# EAGLE board Croduino Damba (EAGLE 6.4)
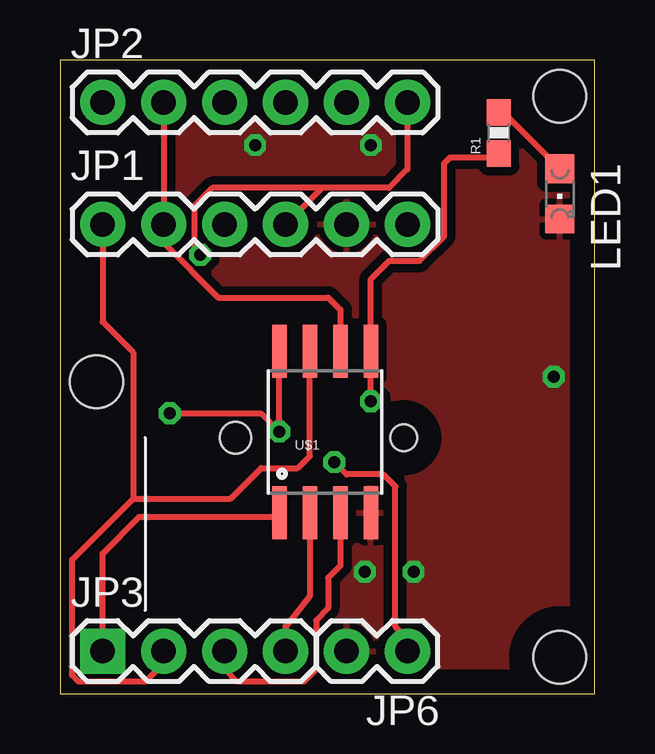
[diagram p0: board, top side]
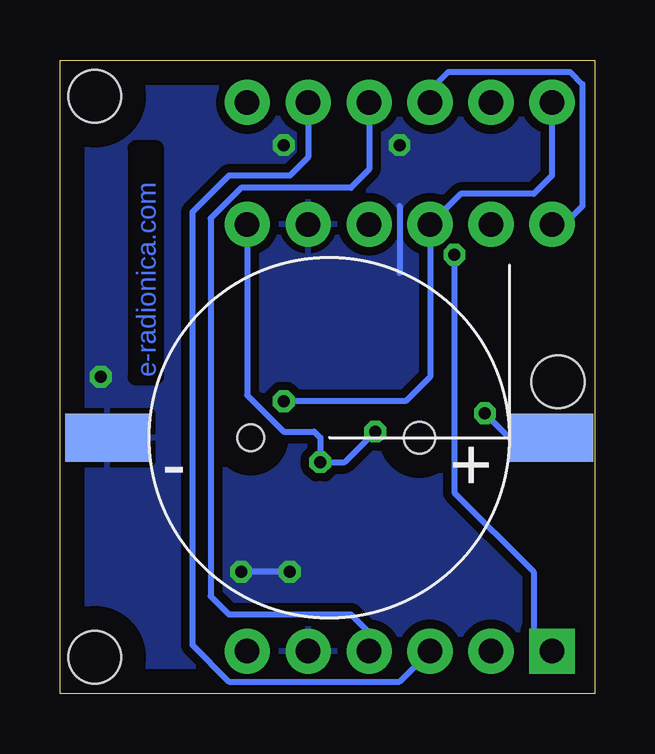
[diagram p1: board, bottom side, seen from below]

Size 22.28 x 26.41 mm. Coordinates in mm from the lower left corner, seen from the top.
Outline: 0,0 22.28,0 22.28,26.41 0,26.41 0,0
Copper layers (1*16): Top 0.035mm / dielectric 1.5mm / Bottom 0.035mm
Design rules "default *": minimum track width 10mil, minimum drill 24mil, track to track 8mil, track to pad 8mil, pad to pad 8mil, via to via 8mil, smd to smd 8mil, copper to edge 40mil, drill to drill 8mil, minimum pad ring 10mil, minimum via ring 8mil, stop-mask expansion 0mil, vias tented up to drill 0mil, thermal gap 10mil
Net classes: 0 default: clearance 0.355 mm
Holes 2.2 mm at 20.83,1.52 20.83,24.89 1.52,13

## Footprints (pad centres in the part's own frame; a part is rotated, then mirrored left to right if it is on the bottom)
1X06 = drill 1.016 pad 1.88: 1 0,0; 2 2.54,0; 3 5.08,0; 4 7.62,0; 5 10.16,0; 6 12.7,0
1X04 = drill 1.016 pad 1.88 square: 1 0,0 | drill 1.016 pad 1.88: 2 2.54,0; 3 5.08,0; 4 7.62,0
1X02 = drill 1.016 pad 1.88: 1 0,0; 2 2.54,0
CHIPLED_0805 = smd 1.2 x 1.2: A 0,-1.05; C 0,1.05
0603-RES = smd 1.1 x 1: 1 -0.85,0; 2 0.85,0
SO08-EIAJ = smd 0.61 x 2.21: 1 -1.905,-3.378; 2 -0.635,-3.378; 3 0.635,-3.378; 4 1.905,-3.378; 5 1.905,3.353; 6 0.635,3.353; 7 -0.635,3.353; 8 -1.905,3.353
BATERIJA12MM = smd 3.5 x 2 bottom: + 9.25,0; - -9.25,0 | hole 1.1: -3.276,0 | hole 1.3: 3.744,0

## Placement (x,y rotation side)
JP1  [1X06]  1.78,19.56 0 top
JP2  [1X06]  1.78,24.64 0 top
JP3  [1X04]  1.78,1.78 0 top
JP6  [1X02]  14.48,1.78 180 top
LED1  plava  [CHIPLED_0805]  20.83,20.83 180 top
R1  470  [0603-RES]  18.29,23.37 90 top
U$1  ATTINY45  [SO08-EIAJ]  11.05,10.92 0 top
U$2  BATERIJA_CR1220  [BATERIJA12MM]  11.05,10.67 180 top
U$3  [UTICNICA3MM]  18.8,6.1 270 top
U$4  [OSH3MM]  0.25,9.65 270 top
U$5  [DAMBA]  13.46,19.05 270 top

## Library data of the parts
JP1-JP3 JP6 R1 U$1 = SparkFun
LED1 = adafruit
U$2-U$5 = ERADIONICA

## Nets
D0: JP1.3 JP2.1 R1.1 U$1.5
D1: JP1.2 JP2.2 U$1.6
D2: JP1.1 JP2.3 JP3.2 U$1.7
D3: JP2.4 JP3.4 U$1.2
D4: JP2.5 JP3.3 U$1.3
GND: JP1.5 JP6.2 LED1.C U$1.4 U$2.-
N$1: LED1.A R1.2
RST: JP1.4 JP2.6 JP3.1 U$1.1
VCC: JP1.6 JP6.1 U$1.8 U$2.+

## Tracks (layer width: path | path; a pad name or v marks a point on that pad's centre or on a via)
D0  (via drill 0.5)
  Top 0.254: v12.95,12.19 U$1.5 12.95,17.27 13.72,18.03 14.99,18.03 16,19.05 16,22.1 16.26,22.35 18.12,22.35 R1.1
  Bottom 0.254: JP2.1 1.78,21.59 2.54,20.83 5.59,20.83 JP1.3 6.86,13.21 7.87,12.19 v12.95,12.19
D1
  Top 0.254: JP2.2 JP1.2 4.32,18.8 6.6,16.51 11.18,16.51 11.68,16 U$1.6
D2
  Top 0.254: JP3.2 4.32,1.27 3.56,0.51 0.76,0.51 0.51,0.76 0.51,5.59 3.05,8.13 | 3.05,8.13 7.11,8.13 8.38,9.4 9.91,9.4 10.41,9.91 U$1.7 | JP1.1 1.78,15.49 3.05,14.22 3.05,8.13
  Bottom 0.254: JP2.3 6.86,25.15 6.1,25.91 1.02,25.91 0.51,25.4 0.51,20.32 1.02,19.81 1.52,19.81 JP1.1
D3
  Top 0.254: U$1.2 10.41,4.06 9.4,2.79 JP3.4
  Bottom 0.254: JP2.4 9.4,21.84 10.16,21.08 14.73,21.08 16,19.81 16,4.06 15.24,3.3 10.16,3.3 9.14,2.29 9.14,2.03 JP3.4
D4
  Top 0.254: U$1.3 11.68,5.33 11.18,4.83 11.18,3.56 10.67,3.05 10.67,1.02 10.16,0.51 7.37,0.51 6.86,1.02 JP3.3
  Bottom 0.254: JP2.5 11.94,22.35 12.7,21.59 15.24,21.59 16.76,20.07 16.76,2.03 15.24,0.51 8.13,0.51 JP3.3
GND  (via drill 0.5)
  Bottom 0.254: v12.7,5.08 v14.73,5.08 | 8.13,20.32 8.13,17.53
  other vias: 8.13,22.86 12.95,22.86 20.57,13.21
  pour Bottom: 0,0 22.35,0 22.35,26.42 0,26.42
  pour Top: 0,0 0,26.42 22.35,26.42 22.35,0
N$1
  Top 0.254: R1.2 18.49,24.22 LED1.A
RST  (via drill 0.5)
  Top 0.254: JP3.1 1.78,5.84 3.3,7.37 8.97,7.37 U$1.1 | JP2.6 14.48,21.84 13.72,21.08 10.92,21.08 | JP1.4 10.92,21.08 | 10.92,21.08 6.35,21.08 5.59,20.32 5.59,18.54 v5.84,18.29
  Bottom 0.254: v5.84,18.29 5.84,8.38 2.54,5.08 2.54,2.54 JP3.1
VCC  (via drill 0.5)
  Top 0.254: JP6.1 14.48,2.29 13.97,2.79 13.97,8.64 13.46,9.14 11.94,9.14 v11.43,9.65 | U$1.8 v9.14,10.92 8.38,11.68 v4.57,11.68
  Bottom 0.254: 8.89,10.67 v9.14,10.92 10.41,9.65 v11.43,9.65 11.43,10.67 11.68,10.92 12.95,10.92 14.48,12.45 JP1.6 | U$2.+ 3.56,10.67 v4.57,11.68

## Text on the board
Bottom: e-radionica.com
bStop: e-radionica.com
200bmp: D0 | D0 | D1 | D2 | D3 | D4 | D5 | 13 | attiny85 | A0 | A1 | A2 | A3 | gnd | +5V